# Altium PCB Copy of UAV_MCNV2P1.PcbDoc (part 1 of 2)
Units mil, origin at the board's own origin, x right, y up, seen from the top; angles counter-clockwise.
Board outline 1765.59 x 1577.6 mil, 6 copper layers (Component Side, Inner Layer 1, Power Plane (VCC), Ground Plane (GND), Inner Layer 2, Solder Side), stack 64.373 mil thick; 120 components, 102 nets, 559 pads, 317 vias.
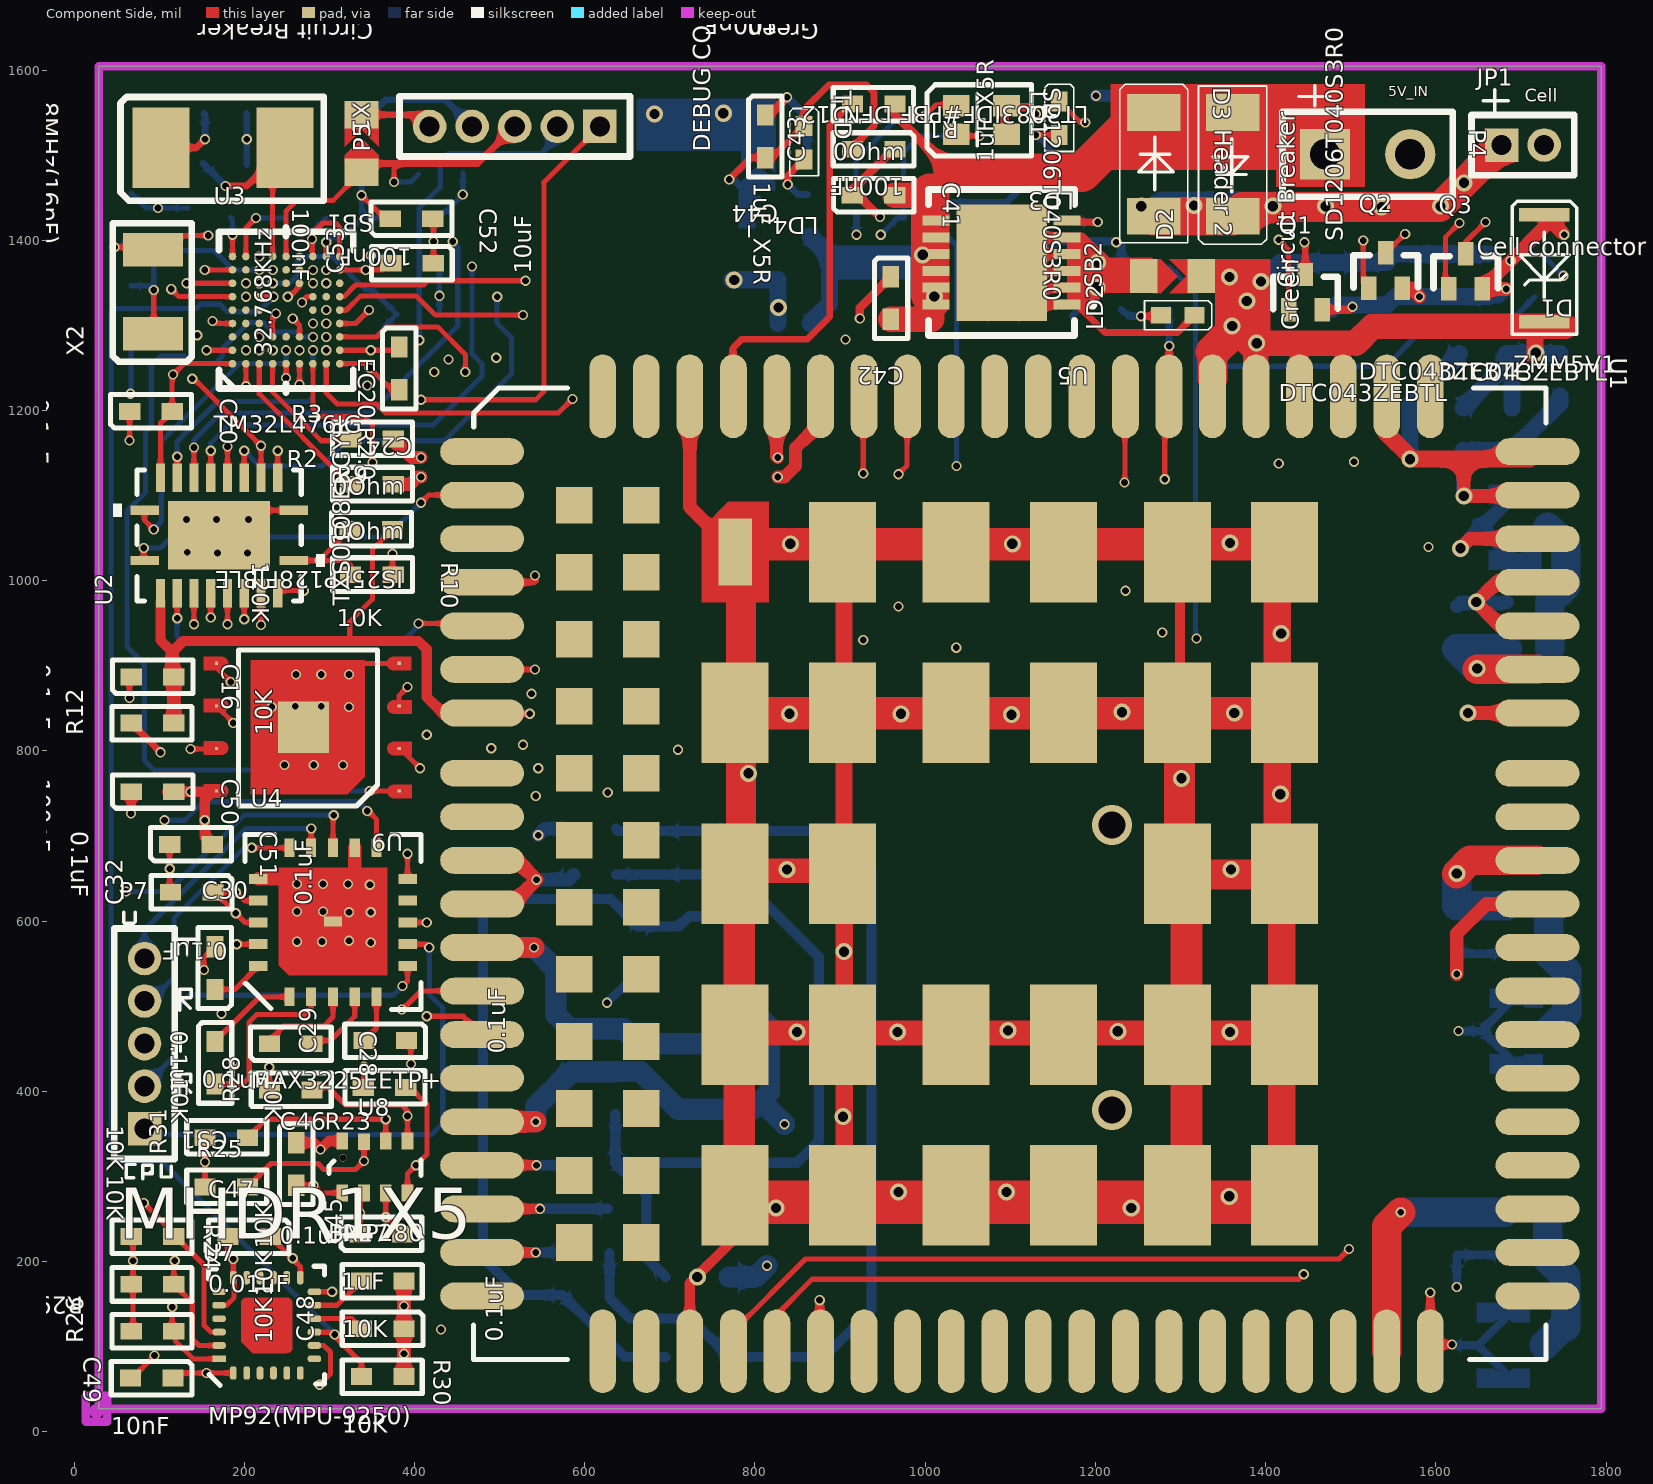
[diagram p0: Component Side view]
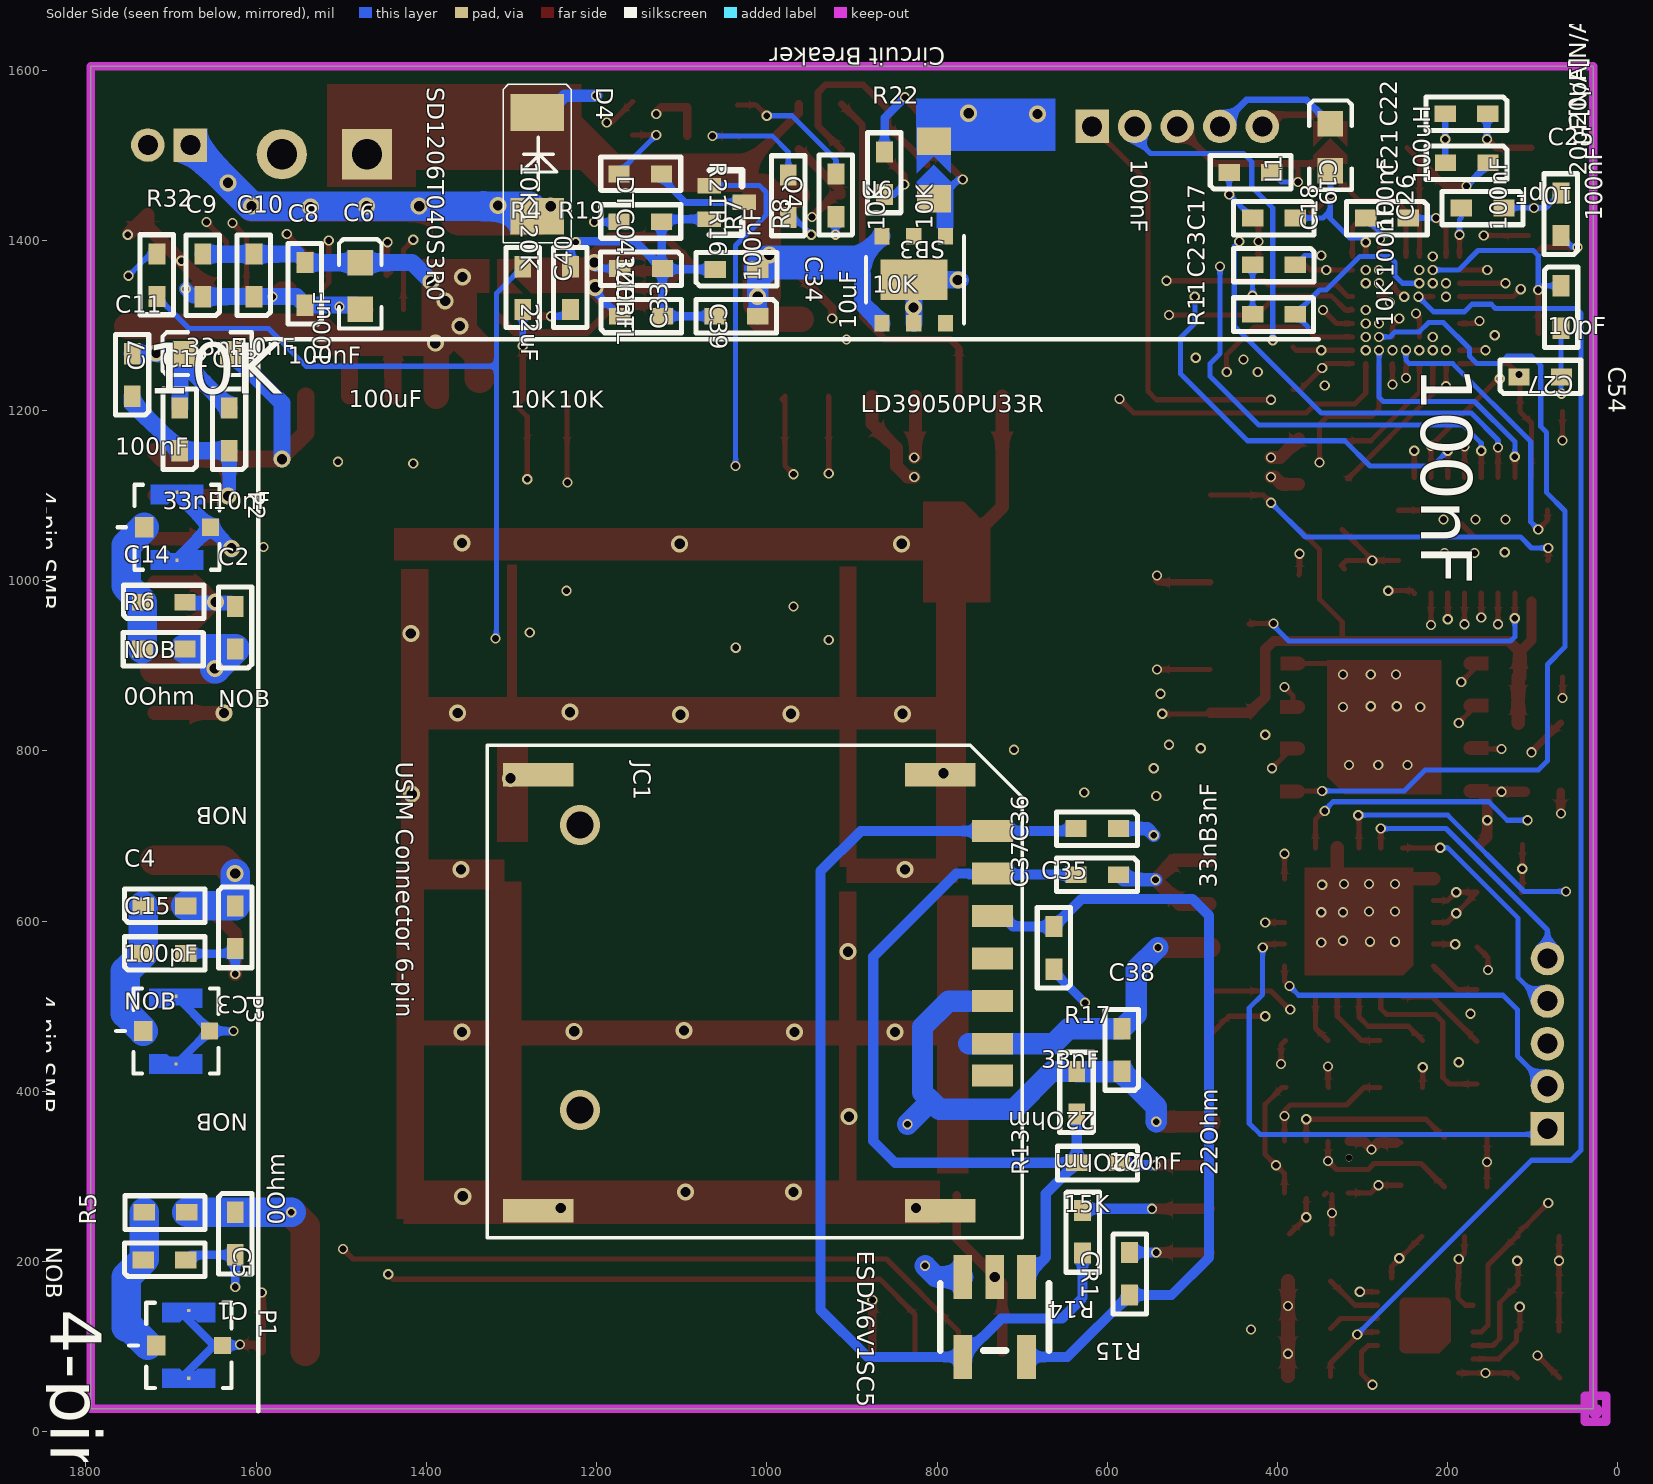
[diagram p1: Solder Side view, seen from below]
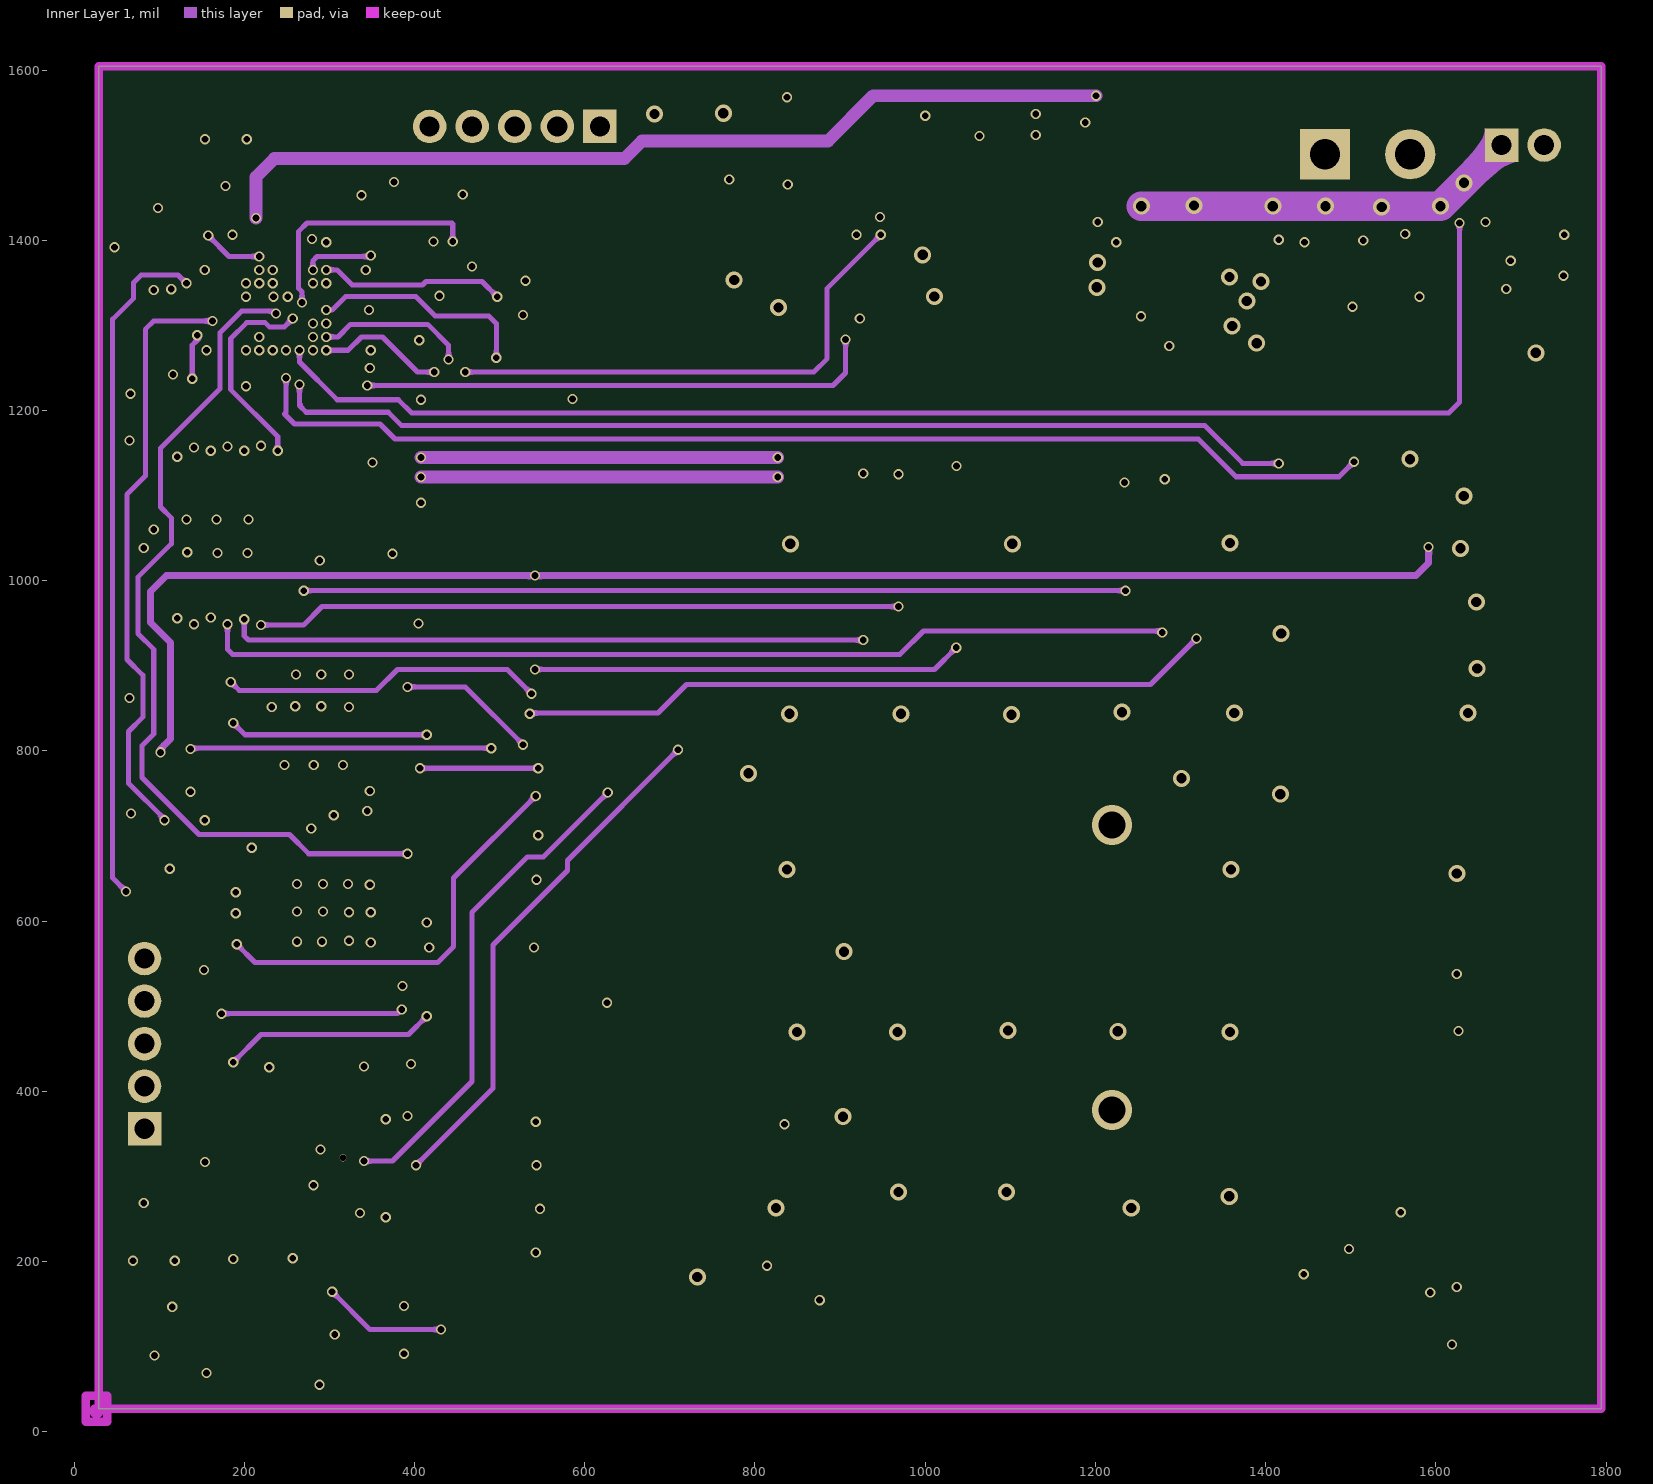
[diagram p2: Inner Layer 1]
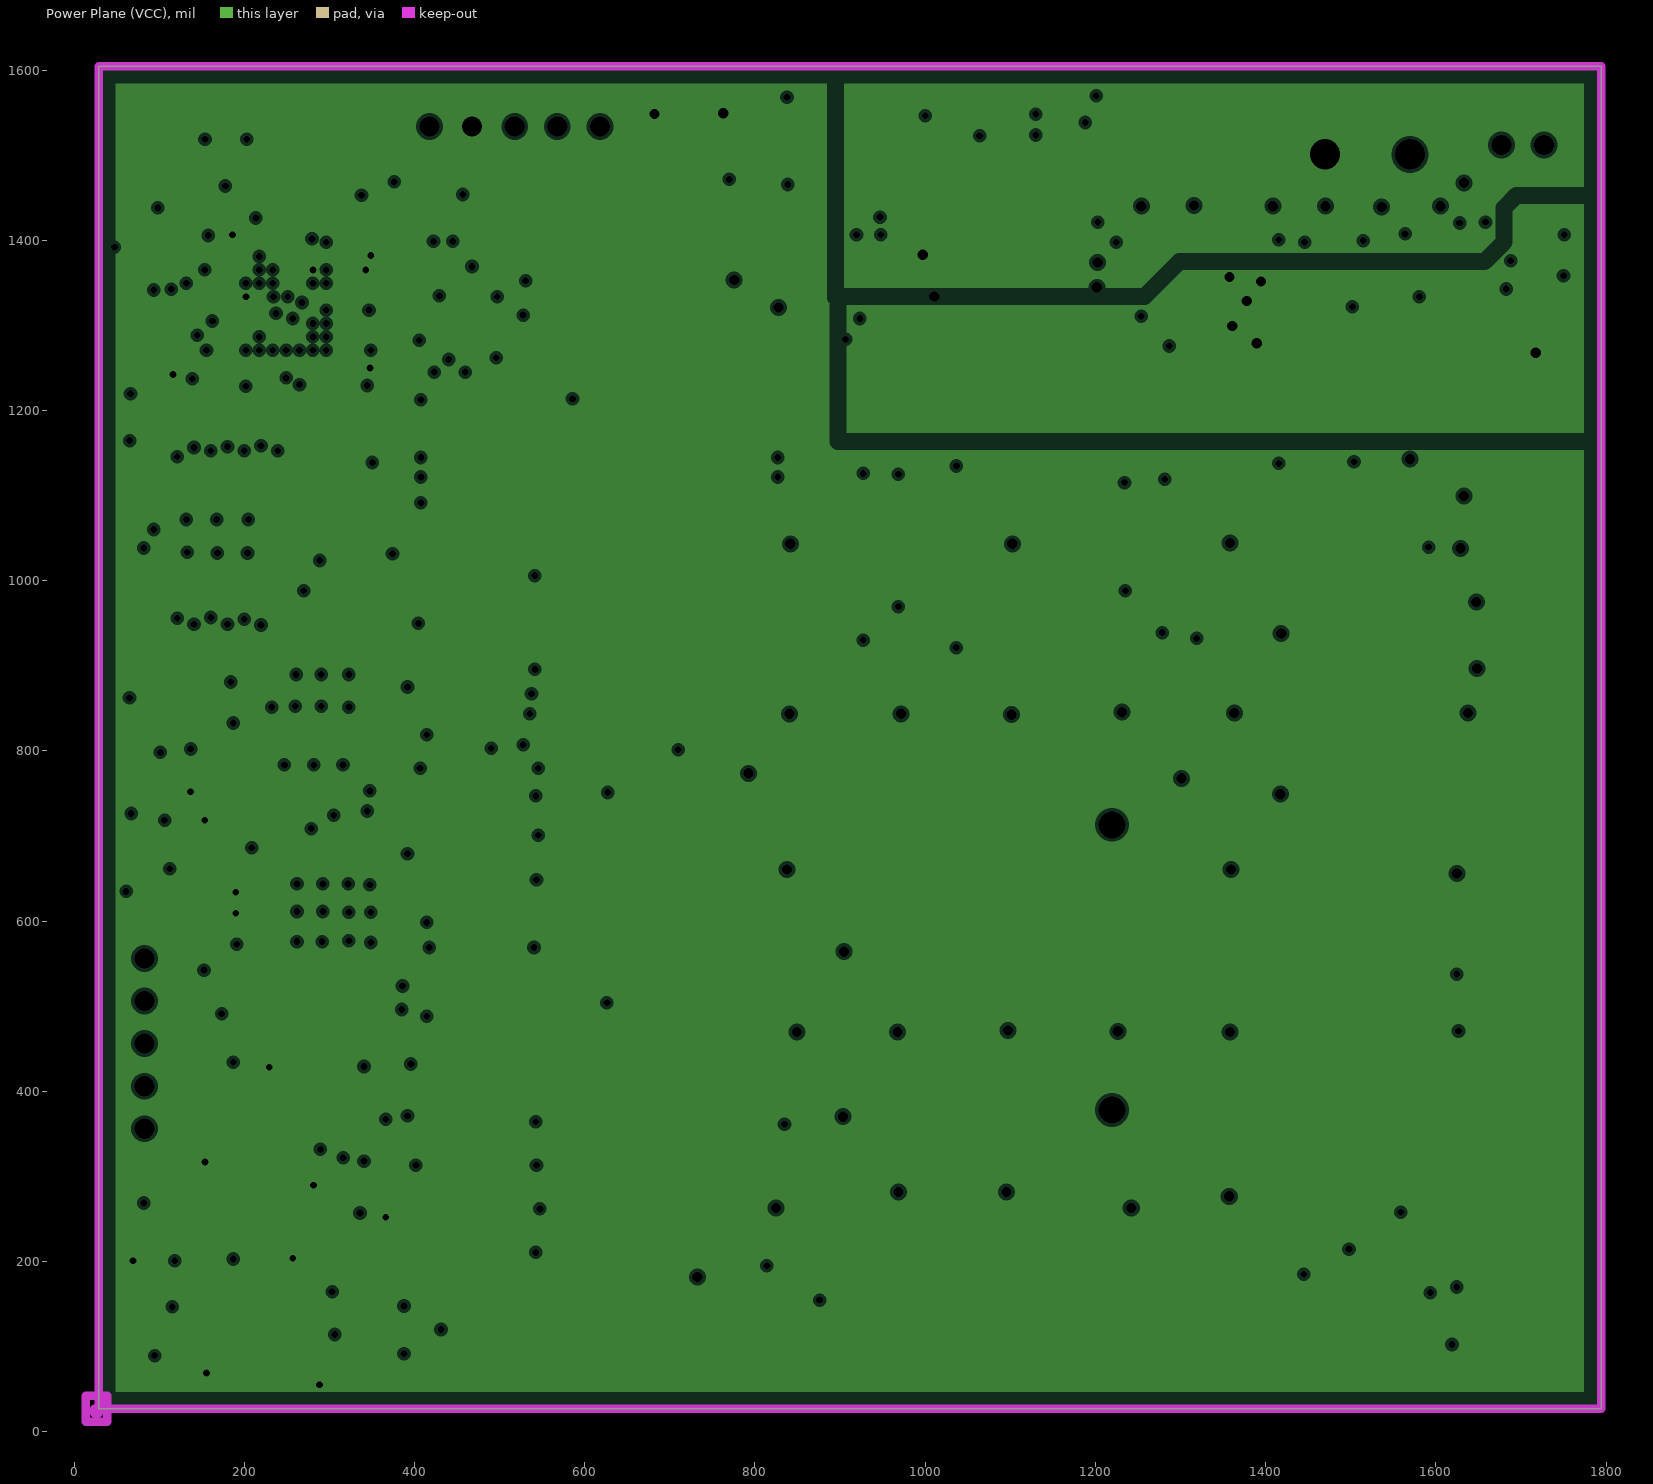
[diagram p3: Power Plane (VCC), clearances drawn from the general rule]
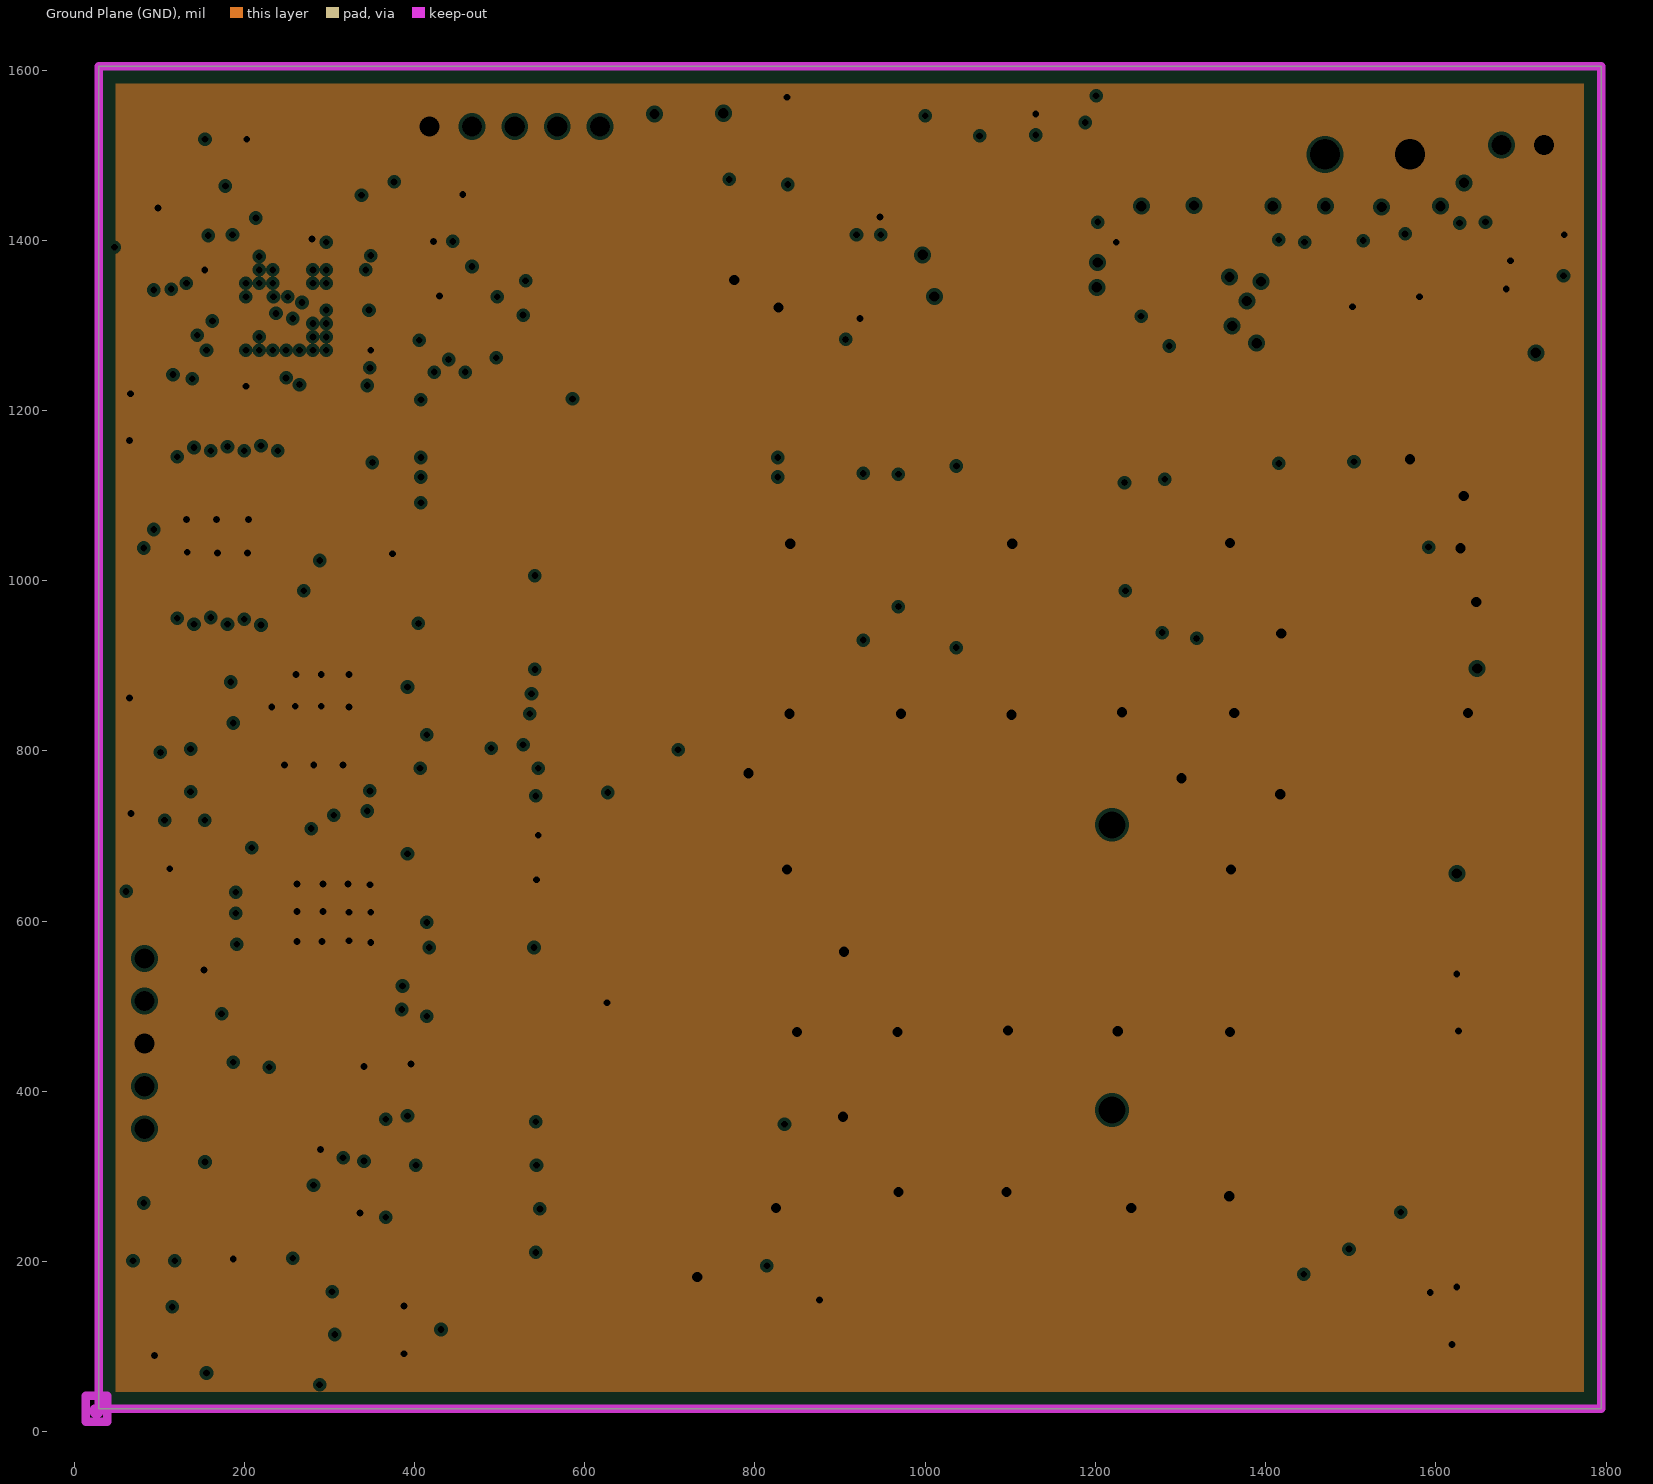
[diagram p4: Ground Plane (GND), clearances drawn from the general rule]
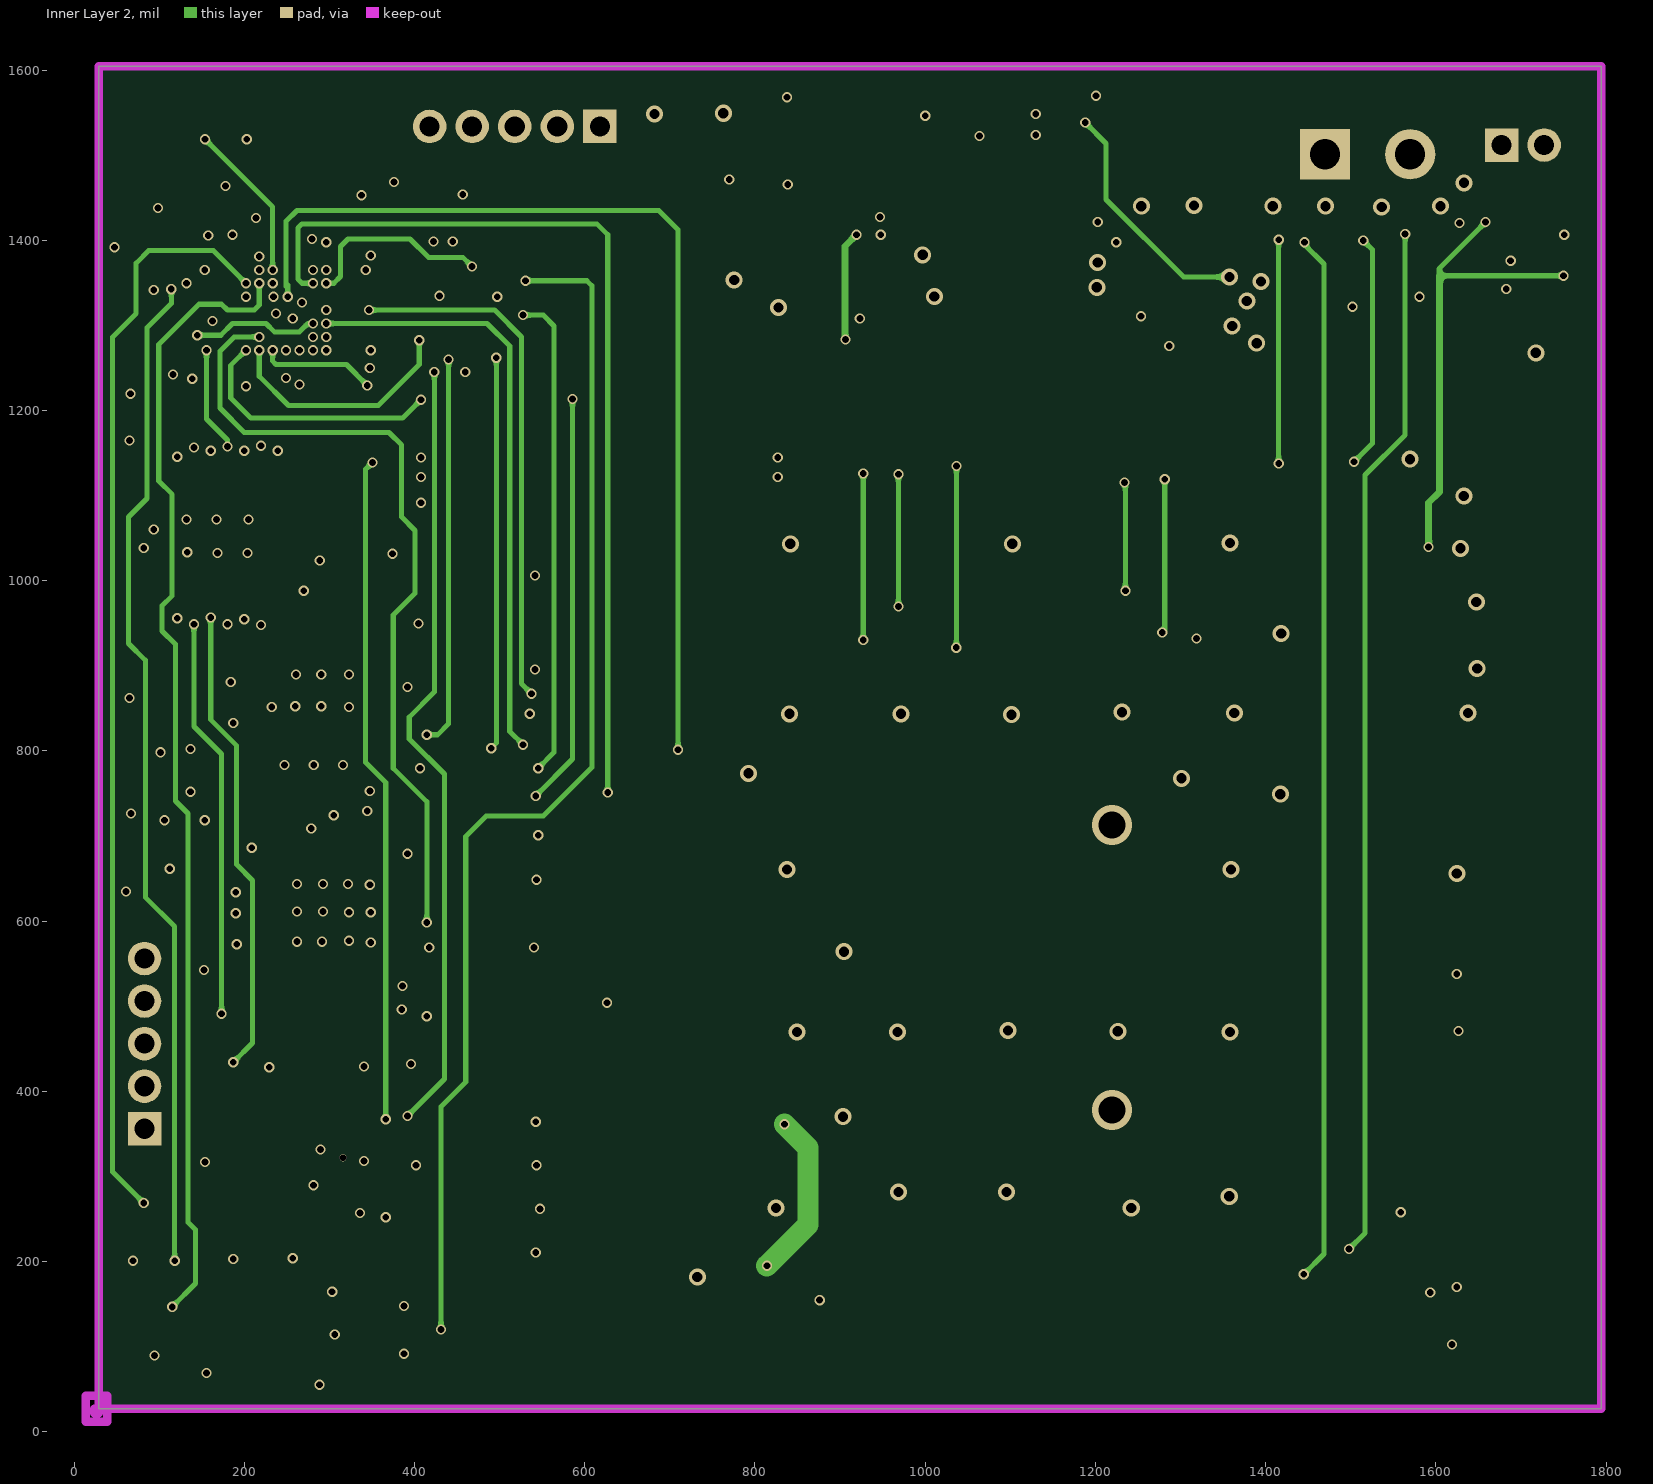
[diagram p5: Inner Layer 2]

## Layer stack, top to bottom
Top Solder: solder mask 0.4, Solder Resist, Dk 3.5
Component Side: signal copper 1.4
Dielectric 1: prepreg 4.724, Dk 4.2
Inner Layer 1: signal copper 1.417
Dielectric 6: core 19.685, FR-4, Dk 4.2
Power Plane (VCC): plane copper 1.417, net (Multiple Nets)
Dielectric 4: prepreg 7.087, Dk 4.2
Ground Plane (GND): plane copper 1.417, net GND
Dielectric 3: core 19.685, Dk 4.2
Inner Layer 2: signal copper 1.417
Dielectric 5: prepreg 4.724, Dk 4.2
Solder Side: signal copper 1.4
Bottom Solder: solder mask 0.4, Solder Resist, Dk 3.5

## Board outline
28.7,26.73 28.7,1604.33 1794.29,1604.33 1794.29,26.73

## Design rules (kind name [scope] priority, off if disabled: settings)
Clearance [All] p1: gap=6 except(3: SMDPad-Via THPad-Via Via-Via)
ComponentClearance [All] p1: gap=7 collisioncheckmode=3 verticalgap=8 showdistances=FALSE
DiffPairsRouting [InDifferentialPairClass('All Differential Pairs')] p1: maxlimit=20 minlimit=8 mostfreqgap=8 toplayer_minwidth=12 toplayer_maxwidth=40 toplayer_prefwidth=15 midlayer1_minwidth=12 midlayer1_maxwidth=40 midlayer1_prefwidth=15 midlayer2_minwidth=12 midlayer2_maxwidth=40 midlayer2_prefwidth=15 bottomlayer_minwidth=12 bottomlayer_maxwidth=40 bottomlayer_prefwidth=15 maxuncoupledlength=100
HoleSize [All] p1: absolutevalues=TRUE maxlimit=100 minlimit=6 maxpercent=80.000 minpercent=20.000
HoleToHoleClearance [All] p1: gap=6 allowstackedmicrovias=TRUE
MinimumSolderMaskSliver [All] p1: minsoldermaskwidth=6
NetAntennae [All] p1: netantennaetolerance=3
PlaneClearance [All] p1: clearance=4
PlaneConnect [All] p1: planeconnectstyle=Direct reliefexpansion=20 reliefentries=4 reliefconductorwidth=10 reliefairgap=10
PolygonConnect [All] p1: connectstyle=Relief reliefconductorwidth=10 reliefentries=4 polygonreliefangle="45 Angle" airgapwidth=10
RoutingCorners [All] p1: cornerstyle=Round minsetback=100 maxsetback=100
RoutingVias [All] p1: holewidth=8 width=12 viastyle="Through Hole" minholewidth=6 minwidth=10 maxholewidth=20 maxwidth=30
SilkToSolderMaskClearance [IsPad] p1: minsilkscreentomaskgap=4 clearancetoexposedcopper=TRUE
SolderMaskExpansion [All] p1: expansion=4
Width Width_GND [InNet('GND')] p1: maxlimit=100 minlimit=6 preferedwidth=16
Width Width_usim [(InNet('USIM_GND') AND InNet('USIM_VDD'))] p2: maxlimit=30 minlimit=20 preferedwidth=25
Width Width_Signle [(InNet('ANT_DIV')OR InNet('ANT_DT') OR InNet('ANT_G')OR InNet('ANT_GT')OR InNet('ANT_M')OR InNet('ANT_MT'))] p3: maxlimit=47.59 minlimit=26 preferedwidth=40.65 toplayer_minwidth=34.69 midlayer1_maxwidth=35.84 midlayer1_prefwidth=30.55 midlayer2_maxwidth=35.84 midlayer2_prefwidth=30.55 bottomlayer_minwidth=34.69 impedancedriven=TRUE minimp=45.000000 maximp=55.000000 favimp=50.000000
Width Width_diff [(InNet('USB_D_N')OR InNet('USB_D_P') OR InNet('USB_N')OR InNet('USB_P'))] p4: maxlimit=40.65 minlimit=30.55 preferedwidth=40.65 toplayer_minwidth=40.65 midlayer1_maxwidth=30.55 midlayer1_prefwidth=30.55 midlayer2_maxwidth=30.55 midlayer2_prefwidth=30.55 bottomlayer_minwidth=40.65 impedancedriven=TRUE minimp=50.000000 maximp=50.000000 favimp=50.000000
Width [All] p5: maxlimit=100 minlimit=6 preferedwidth=6
20 further rules are at their usual default settings.

## Classes and differential pairs
component class EC20: C1 C2 C3 C4 C5 C6 C7 C8 C9 C10 C11 C12 C13 C14 C15 D1 P1 P2 P3 R1 R2 R3 R4 R5 R6 R12 U1
component class MCU: C16 C17 C18 C19 C20 C21 C22 C23 C24 C25 C26 C27 C28 C29 C30 C31 C32 C52 C53 C54 L1 LD1 P4 P5 P7 R7 R8 R9 R10 R11 SB1 U2 U3 U4 X1 X2
component class PWR: C33 C34 C35 C36 C37 C38 C39 C40 C41 C42 C43 C44 CR1 D2 D3 D4 JC1 JP1 LD2 LD3 LD4 Q1 Q2 Q3 Q4 R13 R14 R15 R16 R17 R19 R21 R22 R32 SB2 SB3 U5 U6
component class SENSOR: C45 C46 C47 C48 C49 C50 C51 R23 R24 R25 R26 R27 R28 R29 R30 R31 U7 U8 U9
differential pair USB_D: +USB_D_P -USB_D_N
differential pair USB: +USB_P -USB_N

## Components (designator, comment, footprint, x,y, rotation, side; value= is the part's Value field where it differs from the comment)
C1 "NOB" 0402C 1009.87,-4665 r270 bottom
C2 "NOB" 0402C 2239.54,5842.46 r90 bottom
C3 "NOB" 0402C 1009.87,-4305 r270 bottom
C4 "100pF" 0402C -3190.03,1232.57 r180 bottom
C5 "NOB" 0402C -3190.03,816.57 r180 bottom
C6 "100uF" 0603C 1477.7,1346.23 r90 bottom
C7 "100uF" 0603C 1655.2,1266.73 r0 bottom
C8 "100nF" 0402C 2157.54,6246.46 r90 bottom
C9 "33nF" 0402C 2277.54,6256.46 r90 bottom
C10 "10nF" 0402C 2217.54,6256.46 r90 bottom
C11 "100nF" 0402C 2360.54,6139.46 r90 bottom
C12 "33nF" 0402C 2304.54,6075.46 r90 bottom
C13 "10nF" 0402C 2246.54,6075.46 r90 bottom
C14 "NOB" 0402C -3189.03,1589.57 r180 bottom
C15 "NOB" 0402C -3190.03,1176.57 r180 bottom
C16 "0.1uF" 0402C 4989.86,1501.65 r0 top
C17 "100nF" 0402C 5301.87,811.35 r0 bottom
C18 "100nF" 0402C 5168.99,811.35 r0 bottom
C19 "100nF" 0402C -4466.03,2094.57 r180 bottom
C20 "0.1uF" 0402C 4987.89,1813.65 r0 top
C21 "20pF[N/A]" 0402C 5075.29,876.31 r0 bottom
C22 "20pF[N/A]" 0402C 5075.43,933.9 r0 bottom
C23 "100nF" 0402C 5301.87,756.23 r0 bottom
C24 "100nF" 0402C 996.72,-3648.32 r270 top
C25 "10pF" 0402C 681.76,6328.24 r90 bottom
C26 "100nF" 0402C 5056.59,823.16 r0 bottom
C27 "10pF" 0402C -547.91,-3576.28 r270 bottom
C28 "0.1uF" 0402C 5152.26,1070.54 r0 top
C29 "0.1uF" 0402C -4532.18,-155.19 r180 top
C30 "0.1uF" 0402C -449.48,5442.42 r90 top
C31 "0.1uF" 0402C 780.19,-4464.27 r270 top
C32 "0.1uF" 0402C -4759.54,19.02 r180 top
C33 "10uF" 0402C 5933.43,695.9 r0 bottom
C34 "100nF" 0402C -3862.03,1980.57 r180 bottom
C35 "33nF" 0402C 1277.24,5466.24 r90 bottom
C36 "33nF" 0402C 5509.54,93.83 r0 bottom
C37 "33nF" 0402C 5509.54,39.69 r0 bottom
C38 "100nF" 0402C 1197.51,5346.16 r90 bottom
C39 "22uF" 0402C -3750.03,1925.57 r180 bottom
C40 "100nF" 0402C 6045.43,751.9 r0 bottom
C41 "1uF_X5R" 0402C 5837.1,2067.59 r0 top
C42 "100nF" 0402C 1574.48,-3565.65 r270 top
C43 "1uF_X5R" 0402C -3958.17,892.06 r180 top
C44 "100nF" 0402C 1426.84,-3375.69 r270 top
C45 "1uF" 0402C 5258.56,847.12 r0 top
C46 "0.1uF" 0402C 875.66,-4583.17 r270 top
C47 "0.01uF" 0402C -4692.42,-385.5 r180 top
C48 "0.1uF" 0402C -4535.13,-493.77 r180 top
C49 "10nF" 0402C -4806.59,-551.84 r180 top
C50 "100nF" 0402C 4989.86,1366.8 r0 top
C51 "0.1uF" 0402C 5034.94,1304.8 r0 top
C52 "100nF" 0402C 5293.99,2040.03 r0 top
C53 "10uF" 0402C -4500.68,758.2 r180 top
C54 "100nF" 0402C -4806.59,1854.01 r180 bottom
CR1 "ESDA6V1SC5" SOT23-5L 732.28,134.84 r270 bottom
D1 "ZMM5V1" LL-34 1727.36,1430.12 r270 top
D2 "SD1206T040S3R0" 1206 1361.22,1428.15 r90 top
D3 "SD1206T040S3R0" 1206 1268.7,1550.2 r270 top
D4 "SD1206T040S3R0" 1206 1269.69,1550.2 r270 bottom
JC1 "USIM Connector 6-pin" "NANO SIM socket" 1268.7,771.65 r270 bottom
JP1 "Cell connector" MHDR1X2 1677.36,1511.81 r0 top
L1 "100uH" 0603L 337.7,1509.23 r90 bottom
LD1 "TCD" 0603DD 1036.42,1558.07 r0 top
LD2 "Green" 0402 1296.7,1311.73 r180 top
LD3 "Green" 0402 1157.48,1543.31 r270 top
LD4 "Green" 0402 857.7,1514.73 r270 top
P1 "4-pin SMB" "I-PEX 4" 1679.13,101.38 r270 bottom
P2 "4-pin SMB" "I-PEX 4" 1693.07,1062.73 r270 bottom
P3 "4-pin SMB" "I-PEX 4" 1694.31,470.73 r270 bottom
P4 "Header 2" HDR1X2 1469.88,1500.98 r0 top
P5 "DEBUG CONNECTOR" MHDR1X5 617.7,1533.73 r180 top
P7 "MHDR1X5" MHDR1X5 82.68,355.91 r90 top
Q1 "DTC043ZEBTL" SOT-416FL 1446.7,1338.08 r0 top
Q2 "DTC043ZEBTL" SOT-416FL 1541.01,1363.42 r0 top
Q3 "DTC043ZEBTL" SOT-416FL 1635.01,1362.42 r0 top
Q4 "DTC043ZEBTL" SOT-416FL 1048.02,1444.42 r270 bottom
R1 "0Ohm" 0402R 964.57,1560.04 r180 top
R2 "0Ohm" 0402R 325,1113.19 r0 top
R3 "0Ohm" 0402R 325,1166.34 r0 top
R4 "10K" 0402R 1286.7,1318.73 r90 bottom
R5 "0Ohm" 0402R 1681.7,257.73 r0 bottom
R6 "0Ohm" 0402R 1683.7,919.73 r0 bottom
R7 "10K" 0402R 974.7,1426.73 r90 bottom
R8 "10K" 0402R 918.7,1427.73 r90 bottom
R9 "10K" 0402R 324.02,1060.04 r0 top
R10 "120K" 0402R 324.8,1006.89 r0 top
R11 "10K" 0402R 379.13,1312.99 r0 bottom
R12 "10K" 0402R 117.13,832.68 r180 top
R13 "22Ohm" 0402R 585.83,315.94 r0 bottom
R14 "22Ohm" 0402R 628.94,259.84 r270 bottom
R15 "22Ohm" 0402R 573.82,210.63 r270 bottom
R16 "120K" 0402R 1173.7,1421.73 r180 bottom
R17 "15K" 0402R 635.83,373.23 r90 bottom
R19 "10K" 0402R 1230.7,1318.73 r90 bottom
R21 "10K" 0402R 1173.7,1477.73 r180 bottom
R22 "10K" 0402R 861.7,1453.73 r90 bottom
R23 "10K" 0402R 339.57,404.53 r0 top
R24 "10K" 0402R 117.13,229.33 r180 top
R25 "10K" 0402R 153.74,287.4 r0 top
R26 "10K" 0402R 117.13,118.11 r180 top
R27 "10K" 0402R 387.6,177.17 r180 top
R28 "10K" 0402R 229.53,401.58 r0 top
R29 "10K" 0402R 117.13,173.23 r180 top
R30 "10K" 0402R 387.6,64.96 r180 top
R31 "10K" 0402R 153.74,345.47 r0 top
R32 "10K" 0402R 1716.54,1333.86 r90 bottom
SB1 "Circuit Breaker" JP2_SMD 337.7,1513.73 r270 top
SB2 "Circuit Breaker" JP2_SMD 1290.7,1357.73 r180 top
SB3 "Circuit Breaker" JP2_SMD 803.7,1482.48 r270 bottom
U1 "EC20 R2.0" EC20_R2.0 1099.41,655.51 r0 top
U2 "TXS0108ERGYR" PVQFN-N20 170.28,1053.15 r90 top
U3 "TM32L476JG" WLCSP72 249.02,1317.91 r90 top
U4 "MAX3225EETP+" TQFN 304.13,598.43 r0 top
U5 "LT3083IDF#PBF DFN_12" DFN-12_DF 1089.7,1373.73 r180 top
U6 "LD39050PU33R" DFN6(3X3) 827.3,1353.55 r180 bottom
U7 "MP92(MPU-9250)" "QFN 3*3" 226.38,125 r90 top
U8 "BMP280" LGA-BMP 353.35,311.02 r90 top
U9 "IS25LP128FJBLE" WSON-ISSI 377.95,827.76 r180 top
X1 "8MHz(16pF)" 5032 102.03,1508.73 r0 top
X2 "32.768KHz" 3215 92.69,1290.31 r90 top

## Footprints (in the part's own frame and the unit in brackets; to place one, negate y for a bottom-side part, rotate by r counter-clockwise, add the part's x,y. Pads: shape width x height; smd on the part's side, far side on the other; paste and mask are expansions set on the pad)
0402 [mm] "Chip Capacitor, Body 1.0x0.5mm, IPC High Density"
  rect 0.6x0.5 smd: 1(-0.5,0) 2(0.5,0)
  silkscreen extent -1.02,-0.43 0.99,0.43, body extent -0.55,-0.3 0.55,0.3, height 1.3
0402C [mm] "0402 for capacitor"
  rect 0.635x0.5 smd: 1(-125.037,-15.617) 2(-123.767,-15.617)
  silkscreen extent -125.6,-16.11 -123.19,-15.11
0402R [mm] "0402 for resistor"
  rect 0.635x0.5 smd: 1(0,0) 2(1.27,0)
  silkscreen extent -0.55,-0.49 1.84,0.51
0603C [mil]
  rect 30x30 smd: 1(27.5,0) 2(-27.5,0)
  silkscreen extent -50,-25 55,25
0603DD [mm] "twise colour diode"
  rect 0.8x0.65 smd: 1(0,0) 2(1.5,-0.85) 2(1.5,0) 3(0,-0.85)
  silkscreen extent -0.87,-1.5 2.25,0.63
0603L [mil]
  rect 30x30 smd: 1(27.5,0) 2(-27.5,0)
  silkscreen extent -50,-25 55,25
1206 [mm] "4*1.6mm"
  rect 1.1x1.6 smd: 1(0,0) 2(3.1,0)
  silkscreen extent -0.84,-1.02 3.89,1.02, body extent 0.03,-0.89 3.12,0.83, height 1.3
3215 [mm] "FC-135/FC-135R"
  rect 1x1.8 smd: 1(0,0) 2(2.5,0)
  silkscreen extent -0.84,-1.16 3.29,1.2
5032 [mm] "5.0*3.2*1.2mm"
  rect 1.7x2.4 smd: 1(0,0) 2(3.7,0)
  silkscreen extent -1.21,-1.58 4.86,1.51
DFN6(3X3) [mm]
  rect 0.45x0.5 smd: 1(-0.95,-1.3) 2(0,-1.3) 3(0.95,-1.3) 4(0.95,1.3) 5(0,1.3) 6(-0.95,1.3)
  rect 2x1.2 smd: 7(0,0)
  silkscreen extent -1.42,-1.3 1.5,1.3
DFN-12_DF [mm]
  rect 0.805x0.3 smd paste+0 mask+0: 1(-1.952,1.25) 2(-1.952,0.75) 3(-1.952,0.25) 4(-1.952,-0.25) 5(-1.952,-0.75) 6(-1.952,-1.25) 7(1.952,-1.25) 8(1.952,-0.75) 9(1.952,-0.25) 10(1.952,0.25) 11(1.952,0.75) 12(1.952,1.25)
  rect 2.7x3.48 smd paste-1.727 mask+0: 13(0,0)
  silkscreen extent -2.78,-2.18 2.18,2.18, body extent 0,0 0.25,0.25, height 0.25
EC20_R2.0 [mm]
  oval 2.5x0.8 smd: 1(-15.75,12.6) 2(-15.75,11.3) 3(-15.75,10) 4(-15.75,8.7) 5(-15.75,7.4) 6(-15.75,6.1) 7(-15.75,4.8) 8(-15.75,0.4) 9(-15.75,-0.9) 10(-15.75,-2.2) 11(-15.75,-3.5) 12(-15.75,-4.8) 13(-15.75,-6.1) 14(-15.75,-7.4) 15(-15.75,-8.7) 16(-15.75,-10) 17(-15.75,-11.3) 18(-15.75,-12.6) 37(15.75,-12.6) 38(15.75,-11.3) 39(15.75,-10) 40(15.75,-8.7) 41(15.75,-7.4) 42(15.75,-6.1) 43(15.75,-4.8) 44(15.75,-3.5) 45(15.75,-2.2) 46(15.75,-0.9) 47(15.75,0.4) 48(15.75,4.8) 49(15.75,6.1) 50(15.75,7.4) 51(15.75,8.7) 52(15.75,10) 53(15.75,11.3) 54(15.75,12.6) 141(-15.75,3) 142(-15.75,1.7) 143(15.75,1.7) 144(15.75,3)
  oval 0.8x2.5 smd: 19(-9.55,-14.25) 20(-8.25,-14.25) 21(-6.95,-14.25) 22(-5.65,-14.25) 23(-4.35,-14.25) 24(-3.05,-14.25) 25(-1.75,-14.25) 26(-0.45,-14.25) 27(0.85,-14.25) 28(2.15,-14.25) 29(3.45,-14.25) 30(4.75,-14.25) 31(6.05,-14.25) 32(7.35,-14.25) 33(8.65,-14.25) 34(9.95,-14.25) 35(11.25,-14.25) 36(12.55,-14.25) 55(12.55,14.25) 56(11.25,14.25) 57(9.95,14.25) 58(8.65,14.25) 59(7.35,14.25) 60(6.05,14.25) 61(4.75,14.25) 62(3.45,14.25) 63(2.15,14.25) 64(0.85,14.25) 65(-0.45,14.25) 66(-1.75,14.25) 67(-3.05,14.25) 68(-4.35,14.25) 69(-5.65,14.25) 70(-6.95,14.25) 71(-8.25,14.25) 72(-9.55,14.25) 113(-10.85,14.25) 114(-12.15,14.25) 115(-10.85,-14.25) 116(-12.15,-14.25)
  rect 2x3 smd: 85(8.2,9.6) 86(8.2,4.8) 87(8.2,0) 88(8.2,-4.8) 89(8.2,-9.6) 90(5,9.6) 91(5,4.8) 92(5,0) 93(5,-4.8) 94(5,-9.6) 95(1.6,9.6) 96(1.6,4.8) 97(1.6,-4.8) 98(1.6,-9.6) 99(-1.6,9.6) 100(-1.6,4.8) 101(-1.6,-4.8) 102(-1.6,-9.6) 103(-5,9.6) 104(-5,4.8) 105(-5,0) 106(-5,-4.8) 107(-5,-9.6) 109(-8.2,4.8) 110(-8.2,0) 111(-8.2,-4.8) 112(-8.2,-9.6)
  rect 1x2 smd: 108(-8.2,9.6)
  rect 1.1x1.1 smd: 117(-11,11) 118(-11,9) 119(-11,7) 120(-11,5) 121(-11,3) 122(-11,1) 123(-11,-1) 124(-11,-3) 125(-11,-5) 126(-11,-7) 127(-11,-9) 128(-11,-11) 129(-13,11) 130(-13,9) 131(-13,7) 132(-13,5) 133(-13,3) 134(-13,1) 135(-13,-1) 136(-13,-3) 137(-13,-5) 138(-13,-7) 139(-13,-9) 140(-13,-11)
  Component Side pour cut-out: 3.5,2.8 -3.5,2.8 -3.5,-2.8 3.5,-2.8 3.5,2.8
  Component Side region: -9.2,10.3 -8.4,11.1 -7.2,11.1 -7.2,8.1 -9.2,8.1 -9.2,10.3
  silkscreen extent -16,-14.5 16,14.5
HDR1X2 [mm] "Connector; Header; 2 Position"
  rect 1.5x1.5 hole 0.9: 1(0,0)
  round 1.5 hole 0.9: 2(2.54,0)
  silkscreen extent -1.27,-1.27 3.81,1.27
"I-PEX 4" [mm] "I-PEX 4 genarator 2*2*0.6mm"
  rect 0.6x0.55 smd: 1(0,-0.975)
  rect 0.1x0.1 smd: 2(0.985,0) 4(-1.041,0)
  rect 0.508x0.508 smd: 3(0,1)
  Component Side region: -1.27,-0.79 -1.27,0.79 -0.69,0.79 -0.69,0.27 -0.77,0.19 -0.77,-0.19 -0.69,-0.27 -0.69,-0.79
  Component Side region: 1.27,0.79 1.27,-0.79 0.69,-0.79 0.69,-0.27 0.77,-0.19 0.77,0.19 0.69,0.27 0.69,0.79
  silkscreen extent -1.27,-1.78 1.27,1.27
JP2_SMD [mil]
  rect 32x40 smd: 1(33.75,0) 2(-33.75,0)
  Component Side region: -26.25,0 -16.25,0 3.75,-20 -26.25,-20
  Component Side region: -26.25,0 -16.25,0 3.75,20 -26.25,20
  Component Side region: 23.75,20 13.75,20 -6.25,0 13.75,-20 23.75,-20
LGA-BMP [mm] "LGA 2.0*2.5*0.95mm"
  rect 0.5x0.35 smd: 1(0.775,0.975) 2(0.755,0.325) 3(0.775,-0.325) 4(0.775,-0.975) 5(-0.775,-0.975) 6(-0.775,-0.325) 7(-0.775,0.325) 8(-0.775,0.975)
  silkscreen extent -0.25,-1.38 0.2,1.37
LL-34 [mm] "ZMM5V1 Diode 3.5*1.5mm"
  rect 0.4x1.5 smd: 1(0,0) 2(3.2,0)
  silkscreen extent -0.4,-0.95 3.57,0.97
MHDR1X2 [mm] "Connector; Header; 2 Position"
  rect 1x1 hole 0.6: 1(0,0)
  round 1 hole 0.6: 2(1.27,0)
  silkscreen extent -0.9,-0.9 2.17,0.9
MHDR1X5 [mm] "Connector; Header; 5 Position"
  rect 1x1 hole 0.6: 1(0,0)
  round 1 hole 0.6: 2(1.27,0) 3(2.54,0) 4(3.81,0) 5(5.08,0)
  silkscreen extent -0.9,-0.9 5.98,0.9
"NANO SIM socket" [mm] "NANO SIM socket 9.56*12.5mm"
  rect 0.7x2.1 smd: 0(0,0) 0(0,12) 0(13,0) 0(13,12)
  rect 0.65x1.23 smd: 1(6.75,13.565) 2(4.21,13.565) 3(1.67,13.565) 5(8.02,13.565) 6(5.48,13.565) 7(2.94,13.565) CD(8.97,13.565)
  silkscreen extent -0.89,-1.52 13.82,14.45
PVQFN-N20 [mm] "RGY20 4.65*3.65*1"
  rect 0.28x0.85 smd paste-0.412 mask+0: 1(-0.75,2.225) 10(-0.75,-2.225) 11(0.75,-2.225) 20(0.75,2.225)
  rect 0.85x0.28 smd paste-0.412 mask+0: 2(-1.725,1.75) 3(-1.725,1.25) 4(-1.725,0.75) 5(-1.725,0.25) 6(-1.725,-0.25) 7(-1.725,-0.75) 8(-1.725,-1.25) 9(-1.725,-1.75) 12(1.725,-1.75) 13(1.725,-1.25) 14(1.725,-0.75) 15(1.725,-0.25) 16(1.725,0.25) 17(1.725,0.75) 18(1.725,1.25) 19(1.725,1.75)
  rect 2.05x3.05 smd paste-1.512 mask-1.511: 21(0,0)
  silkscreen extent -1.95,-3.16 1.95,3.16, body extent 0,0 0.25,0.25, height 0.25
"QFN 3*3" [mm] "24-pin QFN 3.0*3.0*1mm"
  rrect80% 0.4x0.2 smd mask+0.05: 1(-1.425,1.002) 2(-1.425,0.602) 3(-1.425,0.202) 4(-1.424,-0.198) 5(-1.424,-0.598) 6(-1.424,-0.998) 13(1.42,-0.998) 14(1.42,-0.598) 15(1.42,-0.198) 16(1.42,0.202) 17(1.42,0.602) 18(1.42,1.002)
  rrect80% 0.2x0.4 smd mask+0.05: 7(-1.002,-1.42) 8(-0.602,-1.42) 9(-0.202,-1.42) 10(0.198,-1.42) 11(0.598,-1.42) 12(0.998,-1.42) 19(0.998,1.424) 20(0.598,1.424) 21(0.198,1.424) 22(-0.202,1.424) 23(-0.602,1.424)
  rrect0% 0.2x0.4 smd mask+0.05: 24(-1.002,1.424)
  Component Side region: -0.677,-0.76 -0.735,-0.748 -0.783,-0.716 -0.816,-0.667 -0.827,-0.61 -0.827,-0.61 -0.827,0.425 -0.488,0.764 0.67,0.764 0.728,0.753 0.776,0.72 0.809,0.672 0.82,0.614 0.82,0.614 0.823,0.612 0.823,-0.607 0.811,-0.665 0.779,-0.714 0.73,-0.746 0.673,-0.757 0.673,-0.757 0.67,-0.76
  silkscreen extent -1.79,-1.73 1.76,1.74
SOT23-5L [mil]
  rect 52x22 smd paste+0 mask+0: 1(-47,37.4) 2(-47,0) 3(-47,-37.4) 4(47,-37.4) 5(47,37.4)
  silkscreen extent -40,-64 40,64, body extent 0,0 10,10, height 10
SOT-416FL [mm]
  rect 0.46x0.7 smd: 1(-0.5,-0.5) 2(0.5,-0.5) 3(0,0.55)
  silkscreen extent -0.96,-0.48 0.96,0.48
TQFN [mm] "Thin QFN , 5*5*0.75mm"
  rect 0.3x0.55 smd: 1(-1.3,-2.225) 2(-0.65,-2.225) 3(0,-2.225) 4(0.65,-2.225) 5(1.3,-2.225) 11(1.3,2.225) 12(0.65,2.225) 13(0,2.225) 14(-0.65,2.225) 15(-1.3,2.225)
  rect 0.55x0.3 smd: 6(2.225,-1.3) 7(2.225,-0.65) 8(2.225,0) 9(2.225,0.65) 10(2.225,1.3) 16(-2.225,1.3) 17(-2.225,0.65) 18(-2.225,0) 19(-2.225,-0.65) 20(-2.225,-1.3) 21(0,0.025)
  Component Side region: 1.625,-1.575 -1.325,-1.575 -1.625,-1.275 -1.625,-1.275 -1.625,1.625 1.625,1.625
  silkscreen extent -2.63,-2.6 2.63,2.63
WLCSP72 [mil]
  round 9 smd paste+0.5 mask+1: A1(-62.99,62.99) A2(-47.24,62.99) A3(-31.5,62.99) A4(-15.75,62.99) A5(0,62.99) A6(15.75,62.99) A7(31.5,62.99) A8(47.24,62.99) A9(62.99,62.99) B1(-62.99,47.24) B2(-47.24,47.24) B3(-31.5,47.24) B4(-15.75,47.24) B5(0,47.24) B6(15.75,47.24) B7(31.5,47.24) B8(47.24,47.24) B9(62.99,47.24) C1(-62.99,31.5) C2(-47.24,31.5) C3(-31.5,31.5) C4(-15.75,31.5) C5(0,31.5) C6(15.75,31.5) C7(31.5,31.5) C8(47.24,31.5) C9(62.99,31.5) D1(-62.99,15.75) D2(-47.24,15.75) D3(-31.5,15.75) D7(31.5,15.75) D8(47.24,15.75) D9(62.99,15.75) E1(-62.99,0) E2(-47.24,0) E3(-31.5,0) E7(31.5,0) E8(47.24,0) E9(62.99,0) F1(-62.99,-15.75) F2(-47.24,-15.75) F3(-31.5,-15.75) F7(31.5,-15.75) F8(47.24,-15.75) F9(62.99,-15.75) G1(-62.99,-31.5) G2(-47.24,-31.5) G3(-31.5,-31.5) G4(-15.75,-31.5) G5(0,-31.5) G6(15.75,-31.5) G7(31.5,-31.5) G8(47.24,-31.5) G9(62.99,-31.5) H1(-62.99,-47.24) H2(-47.24,-47.24) H3(-31.5,-47.24) H4(-15.75,-47.24) H5(0,-47.24) H6(15.75,-47.24) H7(31.5,-47.24) H8(47.24,-47.24) H9(62.99,-47.24) J1(-62.99,-62.99) J2(-47.24,-62.99) J3(-31.5,-62.99) J4(-15.75,-62.99) J5(0,-62.99) J6(15.75,-62.99) J7(31.5,-62.99) J8(47.24,-62.99) J9(62.99,-62.99)
  silkscreen extent -97,-79 97,79, body extent 0,0 10,10, height 10
WSON-ISSI [mm] "WSON IS25LP128JKLE 6*5*0.8mm"
  rect 0.1x0.1 smd: 1(-0.1,1.905) 2(-0.1,0.635) 3(-0.1,-0.635) 4(-0.1,-1.905) 5(5.35,-1.905) 6(5.35,-0.635) 7(5.35,0.635) 8(5.35,1.905)
  rect 1.524x1.524 smd: 9(2.75,0)
  Component Side region: 5.725,-2.1 5.198,-2.1 5.198,-2.1 5.158,-2.1 5.085,-2.07 5.028,-2.013 4.998,-1.94 4.998,-1.86 5.028,-1.787 5.085,-1.73 5.158,-1.7 5.198,-1.7 5.198,-1.7 5.198,-1.7 5.725,-1.7
  Component Side region: 5.725,1.7 5.198,1.7 5.198,1.7 5.158,1.7 5.085,1.73 5.028,1.787 4.998,1.86 4.998,1.94 5.028,2.013 5.085,2.07 5.158,2.1 5.198,2.1 5.198,2.1 5.198,2.1 5.725,2.1
  Component Side region: 5.725,0.425 5.198,0.425 5.198,0.425 5.158,0.425 5.085,0.455 5.028,0.512 4.998,0.585 4.998,0.665 5.028,0.738 5.085,0.795 5.158,0.825 5.198,0.825 5.198,0.825 5.198,0.825 5.725,0.825
  Component Side region: 5.725,-0.85 5.198,-0.85 5.198,-0.85 5.158,-0.85 5.085,-0.82 5.028,-0.763 4.998,-0.69 4.998,-0.61 5.028,-0.537 5.085,-0.48 5.158,-0.45 5.198,-0.45 5.198,-0.45 5.198,-0.45 5.725,-0.45
  Component Side region: -0.468,-0.809 0.059,-0.809 0.059,-0.809 0.098,-0.809 0.172,-0.778 0.228,-0.722 0.259,-0.648 0.259,-0.569 0.228,-0.495 0.172,-0.439 0.098,-0.409 0.059,-0.409 0.059,-0.409 0.059,-0.409 -0.468,-0.409
  Component Side region: -0.472,0.438 0.055,0.438 0.055,0.438 0.095,0.438 0.169,0.469 0.225,0.525 0.255,0.599 0.255,0.678 0.225,0.752 0.169,0.808 0.095,0.838 0.055,0.838 0.055,0.838 0.055,0.838 -0.472,0.838
  Component Side region: -0.468,1.716 0.059,1.716 0.059,1.716 0.098,1.716 0.172,1.747 0.228,1.803 0.259,1.877 0.259,1.956 0.228,2.03 0.172,2.086 0.098,2.116 0.059,2.116 0.059,2.116 0.059,2.116 -0.468,2.116
  Component Side region: 0.925,-2 0.925,1.475 1.45,2 4.325,2 4.325,-2
  Component Side region: -0.462,-2.098 0.065,-2.098 0.065,-2.098 0.105,-2.098 0.179,-2.068 0.235,-2.012 0.265,-1.938 0.265,-1.859 0.235,-1.785 0.179,-1.729 0.105,-1.698 0.065,-1.698 0.065,-1.698 0.065,-1.698 -0.462,-1.698
  silkscreen extent 0.55,-2.3 4.7,2.35

## Part data
C1 C2 C3 C4 C5 C8 C9 C10 C11 C12 C13 C14 C15 C16 C20 C23 C24 C26 C34 C35 C36 C37 C38 C40 C41 C42 C43 C44 C45 C46 C47 C48 C49 C50 C51 C53: library part Cap, "Capacitor"
C6 C7 C28 C29 C30 C31 C32 C33 C39: library part "Cap Pol3", "Polarized Capacitor (Surface Mount)"
C17 C18 C19 C21 C22 C25 C27 C52 C54: library part CAP, "Capacitor"
CR1 U2 U5: "Imported"
D1: library part "Diode BAS70", "Silicon AF Schottky Diode for High-Speed Switching"
JP1: library part JP2
L1: library part Inductor, "Inductor"
LD1: library part Two_Color_LED, "Two Color diode"
LD2 LD3 LD4: library part LED2, "Typical RED, GREEN, YELLOW, AMBER GaAs LED"
P1 P2 P3: library part SMB-4, "4-pin SMB for I-PEX 4"
P4: "Header, 2-Pin"
P5: library part MHDR1X5, "Header, 5-Pin"
P7: "Header, 5-Pin"
R1 R2 R3 R4 R5 R6 R7 R8 R9 R10 R11 R12 R13 R14 R15 R16 R17 R19 R21 R22 R23 R24 R25 R26 R27 R28 R29 R30 R31 R32: library part Res1, "Resistor"
U1: "quectek EC20 R2.0"
U3: library part WLCSP72, "footprint: WLCSP72"
U6: library part LD39050P
U8: "BMP2820"
U9: library part "IS25LP128FJBLE SOIC 8*3"
X1 X2: library part CRYSTAL, "Crystal"

## Via types
v1: diameter 12, hole 8, Component Side to Solder Side, 259 vias
v2: diameter 20, hole 12, Component Side to Solder Side, 55 vias
v3: diameter 47.24, hole 31.5, Component Side to Solder Side, 2 vias
v4: diameter 8.27, hole 7.87, Component Side to Solder Side, 1 vias

## Nets (pads, with @x,y where several pads share a name; then routed paths per layer and width w, separated by ;. In a path a pad name is that pad's centre, name@x,y a point inside that pad or via, vN(x,y) a via of type N, cw(c..) or ccw(c..) an arc to the next point about the centre after c; other vN are vias at no path point)
3P3_MCU: C20.2 C23.1 C24.2 C26.2 C32.1 C45.2 C46.2 C47.1 C49.1 C50.2 C51.2 C53.2 C54.1 L1.1 P5.4 R24.2 R25.1 R26.2 R28.1 R29.2 R31.1 SB3.2 U2.19 U3.A1 U3.A9 U3.B6 U3.G8 U3.J1 U3.J8 U4.17 U4.18 U7.1 U7.8 U7.13 U8.6 U8.8 U9.8 | length 1439.9
  Component Side w6: R26.2@69.09,118.11 v1(69.09,200.79) R24.2@69.09,229.33 ; U2.19@101.38,1121.06 101.38,1185.04 C20.2@115.16,1198.82 115.16,1241.14 v1(116.14,1242.13) 128.94,1254.92 U3.A1@186.02,1254.92 ; C49.1@118.11,62.99 124.02,68.91 v1(155.48,68.91) U7.1@186.93,68.91 ; R25.1@153.74,287.4 v1(153.74,316.93) R31.1@153.74,345.47 ; 162.2,751.18 161.42,751.97 162.2,752.76 170.28,752.76 ; U3.A9@186.02,1380.91 v1(186.02,1406.5) ; U4.18@216.54,598.43 200.79,598.43 v1(189.96,609.25) 165.35,633.86 v1(189.96,633.86) 199.8,624.02 U4.17@216.54,624.02 ; R28.1@229.53,404.53 229.33,404.72 v1(229.33,428.15) v1@230.31,429.13 ; C47.1@230.31,229.33 v1@256.4,203.25 ; C46.2@254.92,289.57 C46.2@260.83,289.57 v1(281.3,289.57) 290.35,280.51 U8.8@314.96,280.51 U8.8@316.93,280.51 ; v1(256.89,203.74) v1@256.4,203.25 ; U7.13@265.67,180.91 265.67,193.98 v1@256.4,203.25 ; U7.8@282.28,101.28 293.4,101.28 301.18,93.5 301.18,67.91 v1(288.39,55.12) ; U3.J1@312.01,1254.92 342.52,1254.92 v1(347.44,1250) 373.03,1224.41 C24.2@381.89,1224.41 ; U3.J8@312.01,1365.16 361.54,1365.16 369.41,1373.03 C53.2@372.05,1373.03 C53.2@379.13,1373.03 ; U8.6@366.14,273.62 v1(366.14,251.97) C45.2@385.83,232.28
  Component Side w12: C50.2@109.25,751.97 v1(136.81,751.97) 161.42,751.97 ; C51.2@162.2,689.96 153.54,698.62 v1(153.54,718.5) 153.54,742.52 162.2,751.18
  Inner Layer 1 w6: v1(280.51,1365.16) 280.51,1375.98 285.43,1380.91 346.46,1380.91 348.43,1382.87 v1(348.43,1381.89)
  Solder Side w6: C54.1@116.14,1239.17 v1(116.14,1242.13) ; 183.7,1426.73 186.02,1424.41 v1(186.02,1406.5) ; v1(348.43,1381.89) 368.31,1381.89 C23.1@379.13,1371.06
  Solder Side w8: L1.1@337.7,1536.73 365.93,1564.96 436.47,1564.96 P5.4@467.7,1533.73
  other v1: 201.77,1333.66 342.52,1365.16
  other v2: 682.09,1548.23 762.8,1549.21
3P8_VBAT: C6.1 C7.1 C8.2 C9.2 C10.2 C11.2 C12.2 C13.2 D1.2 LD3.1 SB2.2 U1.57 U1.58 U1.59 U1.60 | length 1600.5
  Component Side w6: LD3.1@1157.48,1562.99 1182.09,1538.39 v1(1187.99,1538.39)
  Component Side w8: v2@1388.24,1277.7 v2(1389.56,1279.02) ; 1490.6,1273.63 1495.98,1279.02
  Component Side w20: U1.58@1439.42,1216.73 1439.42,1279.02 ; U1.57@1490.6,1216.73 1490.6,1273.63 ; 1495.98,1279.02 1505.98,1279.02
  Component Side w30: U1.59@1388.24,1216.73 v2@1388.24,1277.7 ; v2(1389.56,1279.02) 1439.42,1279.02 1491.14,1279.02 1495.98,1279.02 ; 1390.7,1291.73 v2@1390.7,1343.73 ; 1505.98,1279.02 1525.7,1298.73 D1.2@1751.97,1298.73
  Component Side w35: U1.60@1337.7,1237.73 1337.7,1268.73
  Component Side w40: 1337.7,1268.73 1359.7,1290.73 v2@1360.7,1290.73 ; v2(1357.7,1356.73) 1360.7,1352.98 v2(1360.7,1299.21) v2@1360.7,1290.73 ; v2@1388.24,1277.7 1375.2,1290.73 v2@1360.7,1290.73
  Inner Layer 2 w6: v1(1187.99,1538.39) 1212.6,1513.78 1212.6,1447.83 1303.7,1356.73 v2(1357.7,1356.73)
  Solder Side w8: C8.2@1542.7,1373.73 1552.7,1383.73 ; C7.1@1682.7,1253.73 C7.1@1682.7,1266.73 C7.1@1689.7,1259.73 ; v2@1723.7,1266.73 v2@1726.7,1269.73
  Solder Side w20: v2(1394.68,1351.38) 1394.68,1351.72 1416.7,1373.73 C6.1@1477.7,1373.73 C8.2@1542.7,1373.73 ; 1552.7,1383.73 C10.2@1602.7,1383.73 C9.2@1662.7,1383.73 ; C13.2@1631.7,1202.73 C7.1@1682.7,1253.73 ; C7.1@1682.7,1266.73 1723.7,1266.73 C11.2@1745.7,1266.73 ; C12.2@1689.7,1202.73 C7.1@1689.7,1259.73
  other v2: 1717.52,1267.72 1377.95,1328.74
5V_IN: C33.1 C34.2 C41.2 C42.2 D2.2 D3.1 P4.1 R1.1 U5.7 U5.8 U5.9 U5.10 U5.11 U5.12 U6.1 U6.6 | length 884.1
  Component Side w8: 1011.83,1373.73 1012.83,1372.73 ; U5.10@1012.83,1363.89 1012.83,1372.73 ; U5.9@1012.83,1383.57 1012.83,1372.73
  Component Side w10: R1.1@962.4,1560.04 962.4,1549.41 1032.48,1479.33
  Component Side w30: C42.2@959.65,1307.09 1007.87,1307.09 1007.87,1319.56 U5.12@1012.83,1324.52 ; C41.2@964.37,1452.76 1003.13,1452.76 1006.1,1455.73 ; 1006.1,1373.73 1011.83,1373.73
  Component Side w45: v2@1006.1,1335.72 1006.1,1373.73 1006.1,1382.87 1006.1,1455.73 ; 1032.48,1479.33 1184.06,1479.33 1233.27,1528.54
  Solder Side w20: U6.1@864.7,1302.37 887.7,1325.37 887.7,1359.73 898.7,1370.73 ; U6.6@864.7,1404.73 895.7,1373.73 ; C33.1@1010.7,1310.73 v2(1010.7,1333.73)
  Solder Side w25: v2(1010.7,1333.73) C34.2@1010.7,1365.73
  Solder Side w40: 895.7,1373.73 999.3,1373.73 C34.2@1006.89,1366.14
  other v2: 997.05,1382.87
ANT_DIV: C1.1 R5.1 U1.35 | length 293
  Component Side w34.69: U1.35@1542.32,94.49 1542.32,241.35 v1(1558.7,257.73)
  Solder Side w34.69: v1(1558.7,257.73) C1.1@1624.7,257.73 R5.1@1681.7,257.73
ANT_DT: C5.1 P1.1 R5.2 | length 177.9
  Solder Side w34.69: P1.1@1727.37,101.38 1748.72,122.73 1752.7,122.73 1752.7,181.73 C5.1@1732.7,201.73 1731.7,202.73 R5.2@1731.7,257.73
ANT_G: C3.1 C4.2 U1.47 | length 196.8
  Component Side w34.69: v2(1624.7,655.73) 1640.42,671.46 U1.47@1718.94,671.46
  Solder Side w34.69: v2(1624.7,655.73) C3.1@1624.7,617.73 C4.2@1682.7,617.73
ANT_GT: C4.1 C15.1 P3.1 | length 164.4
  Solder Side w34.69: P3.1@1732.7,470.73 1753.7,491.73 1753.7,540.73 C15.1@1732.7,561.73 C4.1@1732.7,617.73
ANT_M: C2.1 R6.1 U1.49 | length 163.3
  Component Side w34.69: v2@1648.7,895.73 1648.76,895.67 U1.49@1719.49,895.67
  Solder Side w34.69: v2(1648.62,896.65) 1647.78,896.65 C2.1@1624.7,919.73 R6.1@1683.7,919.73
ANT_MT: C14.1 P2.1 R6.2 | length 159.7
  Solder Side w34.69: P2.1@1731.46,1062.73 1752.7,1041.49 1752.7,993.73 C14.1@1733.7,974.73 R6.2@1733.7,919.73
AVDD: C17.1 C52.1 L1.2 U3.H9 | length 224.6
  Component Side w6: U3.H9@296.26,1380.91 297.24,1381.89 296.26,1382.87 v1(296.26,1397.64) ; v1(337.6,1452.76) 365.16,1425.2 C52.1@378.15,1425.2
  Solder Side w6: v1(296.26,1397.64) 301.18,1402.56 314.96,1402.56 338.58,1426.18 337.7,1427.06 337.7,1434.94 ; L1.2@337.7,1481.73 337.7,1434.94 ; C17.1@379.13,1426.18 346.46,1426.18 337.7,1434.94
BMP_CS: R25.2 U3.G7 U8.2 | length 1867.1
  Component Side w6: R25.2@203.74,287.4 231.3,314.96 286.42,314.96 293.31,308.07 330.71,308.07 v1(340.55,317.91) U8.2@340.55,340.75
  Inner Layer 1 w6: v1(340.55,317.91) 374.02,317.91 467.52,411.42 467.52,610.24 532.48,675.2 551.18,675.2 v1(626.97,750.98)
  Inner Layer 2 w6: v1(280.51,1349.41) 267.72,1349.41 262.8,1354.33 262.8,1414.37 267.72,1419.29 614.17,1419.29 626.97,1406.5 v1(626.97,750.98)
BMP_SCK: R28.2 U3.H2 U8.4 | length 1225.1
  Component Side w6: R28.2@279.53,404.53 298.23,404.53 318.9,383.86 384.84,383.86 v1@391.73,376.97 ; U8.4@391.73,341.54 v1(391.73,371.06)
  Inner Layer 1 w6: v1(296.26,1270.67) 321.85,1270.67 337.6,1286.42 362.2,1286.42 403.54,1245.08 v1(423.23,1245.08)
  Inner Layer 2 w6: v1(391.73,371.06) 435.04,414.37 435.04,772.64 393.7,813.98 393.7,839.57 423.23,869.09 v1(423.23,1245.08)
BMP_SDI: R31.2 U3.G1 U8.3 | length 1157.3
  Component Side w6: R31.2@203.74,345.47 225.39,367.13 v1(366.14,367.13) ; U3.G1@280.51,1254.92 280.51,1201.77 289.37,1192.91 341.54,1192.91 350.39,1184.06 v1(350.39,1138.78) ; U8.3@366.14,341.54 v1(366.14,367.13)
  Inner Layer 2 w6: v1(350.39,1138.78) 342.52,1130.91 342.52,786.42 366.14,762.8 v1(366.14,367.13)
BMP_SDO: R23.2 U3.F7 U8.5 | length 1964.7
  Component Side w6: v1(250.98,1333.66) 252.95,1333.66 264.76,1345.47 U3.F7@264.76,1349.41 ; R23.2@389.76,404.53 394.68,404.53 414.37,384.84 414.37,325.79 391.73,303.15 U8.5@391.73,280.51
  Inner Layer 1 w6: v1(401.58,312.99) 492.13,403.54 492.13,571.85 579.72,659.45 579.72,671.26 v1(709.65,801.18)
  Inner Layer 2 w6: v1(250.98,1333.66) 250.98,1347.44 249.02,1345.47 249.02,1422.24 261.81,1435.04 687.01,1435.04 709.65,1412.4 v1(709.65,801.18)
CELL_3P3: C18.1 D4.1 U3.B9 | length 1202.6
  Component Side w6: U3.B9@201.77,1380.91 201.77,1414.37 v1(213.58,1426.18)
  Inner Layer 1 w15: v1(213.58,1426.18) 213.58,1474.41 235.24,1496.06 646.65,1496.06 667.32,1516.73 885.83,1516.73 938.98,1569.88 v1(1200.79,1569.88)
  Solder Side w6: v1(213.58,1426.18) C18.1@246.26,1426.18
  Solder Side w15: v1(1200.79,1569.88) 1237.2,1569.88 D4.1@1243.11,1563.98
CELL_3P7: D2.1 D3.2 D4.2 JP1.1 | length 1339
  Component Side w30: D2.1@1361.22,1428.15 D2.1@1372.05,1438.98
  Component Side w35: D2.1@1372.05,1438.98 1470.47,1438.98 v2(1536.42,1438.98) 1604.53,1438.98 v2(1605.51,1439.96) v2(1633.07,1467.52) JP1.1@1677.36,1511.81
  Component Side w45: D3.2@1268.7,1428.15 D2.1@1361.22,1428.15
  Inner Layer 1 w35: v2(1253.94,1439.96) v2(1408.46,1439.96) v2(1470.47,1439.96) v2(1605.51,1439.96) v2(1633.07,1467.52) JP1.1@1677.36,1511.81
  Solder Side w35: D4.2@1268.7,1430.12 1278.54,1439.96 v2(1408.46,1439.96) v2(1470.47,1439.96) v2(1605.51,1439.96) v2(1633.07,1467.52) JP1.1@1677.36,1511.81
  other v2: 1315.94,1440.94
DB_CLK: P5.1 U3.B2 | length 793.1
  Component Side w6: v1(407.48,1212.6) 542.32,1212.6 552.17,1222.44 552.17,1467.52 551.83,1467.86 P5.1@617.7,1533.73
  Inner Layer 2 w6: v1(201.77,1270.67) 184.06,1252.95 184.06,1214.57 207.68,1190.94 385.83,1190.94 v1(407.48,1212.6)
DB_SDIO: P5.2 U3.C2 | length 663.1
  Inner Layer 2 w6: v1(217.52,1270.67) 217.52,1240.16 251.97,1205.71 357.28,1205.71 405.51,1253.94 v1(405.51,1282.48)
  Solder Side w6: v1(405.51,1282.48) 405.51,1437.99 430.12,1462.6 430.12,1492.13 439.96,1501.97 549.21,1501.97 566.21,1518.97 P5.2@566.21,1533.73
EC20_1P8: C16.2 R4.2 R9.2 R12.1 R32.1 U1.7 U2.2 | length 2497.8
  Component Side w6: 114.17,917.32 115.16,916.34 ; 323.82,929.13 324.8,930.12 ; 323.82,930.12 323.82,951.57 350.39,978.15 350.39,1036.42 R9.2@374.02,1060.04 ; U1.7@479.33,844.49 480.31,843.5 v1(535.43,843.5)
  Component Side w12: U2.2@101.38,975.39 101.38,930.12 114.17,917.32 ; 115.16,916.34 127.95,929.13 323.82,929.13 404.53,929.13 414.37,919.29 414.37,863.19 432.87,844.68 U1.7@478.79,844.68
  Component Side w16: C16.2@115.16,886.81 115.16,916.34 ; R12.1@117.13,832.68 C16.2@117.13,886.81
  Inner Layer 1 w6: v1(535.43,843.5) 535.43,844.49 686.02,844.49 719.49,877.95 1264.76,877.95 v1(1318.9,932.09)
  Solder Side w6: R4.2@1286.7,1368.73 1317.7,1337.73 1317.7,1251.97 ; v1@1317.7,932.09 1317.7,1251.97 ; v1@1318.9,931.1 v1(1318.9,932.09) ; R32.1@1716.54,1333.86 1678.94,1296.26 1585.63,1296.26 1541.34,1251.97 1317.7,1251.97
EC20_CTL: Q1.1 U3.F1 | length 1579.4
  Component Side w6: v1(264.76,1230.32) 264.76,1252.95 265.75,1253.94 U3.F1@264.76,1254.92 ; v1(1415.35,1400.59) 1427.01,1388.93 Q1.1@1427.01,1318.39
  Inner Layer 1 w6: v1(264.76,1230.32) 264.76,1207.68 265.75,1206.69 264.76,1205.71 272.64,1197.83 369.09,1197.83 384.84,1182.09 1328.74,1182.09 1373.03,1137.8 v1(1415.35,1137.8)
  Inner Layer 2 w6: v1(1415.35,1137.8) v1(1415.35,1400.59)
EC20_DBRX: U1.11 U2.4 | length 824.2
  Component Side w6: v1(140.75,948.82) U2.4@140.75,985.24 ; v1(384.84,496.06) 385.83,496.06 407.68,517.91 U1.11@478.79,517.91
  Inner Layer 1 w6: v1(173.23,491.14) 379.92,491.14 v1(384.84,496.06)
  Inner Layer 2 w6: v1(140.75,948.82) 140.75,828.74 173.23,796.26 v1(173.23,491.14)
EC20_DBTX: U1.12 U2.5 | length 904
  Component Side w6: v1(160.43,956.69) U2.5@160.43,985.24 ; v1(414.37,488.19) 457.33,488.19 U1.12@478.79,466.73
  Inner Layer 1 w6: v1(187.01,434.06) 219.49,466.54 392.72,466.54 v1(414.37,488.19)
  Inner Layer 2 w6: v1(160.43,956.69) 160.43,836.61 190.94,806.1 190.94,666.34 209.65,647.64 209.65,456.69 v1(187.01,434.06)
EC20_DIS: Q3.3 R12.2 R32.2 U1.4 | length 2504.4
  Component Side w6: Q3.3@1630.69,1384.07 Q3.3@1635.01,1384.07 1635.01,1397.81 v1(1658.46,1421.26)
  Component Side w8: R12.2@67.13,832.68 101.38,798.43 v1(101.38,798.23) ; U1.4@479.33,998.03 539.37,998.03 541.34,1000 542.32,1000 540.35,1001.97 541.34,1002.95 v1(541.34,1005.91)
  Inner Layer 1 w8: v1@101.38,802.17 113.19,813.98 113.19,927.17 89.57,950.79 89.57,987.2 108.27,1005.91 v1(541.34,1005.91) 1576.77,1005.91 1591.54,1020.67 v1(1591.54,1039.37)
  Inner Layer 2 w6: v1(1658.46,1421.26) 1604.33,1367.13 1604.33,1358.27 v1(1750,1358.27)
  Inner Layer 2 w8: v1(1591.54,1039.37) 1591.54,1091.54 1604.33,1104.33 1604.33,1358.27
  Solder Side w6: R32.2@1716.54,1383.86 1724.41,1383.86 v1(1750,1358.27)
EC20_DISABLE: Q3.1 U3.F2 | length 1703.9
  Component Side w6: Q3.1@1615.33,1342.73 1611.22,1346.84 1611.22,1403.54 v1(1627.95,1420.28)
  Inner Layer 1 w6: v1(264.76,1270.67) 264.76,1256.89 309.06,1212.6 380.91,1212.6 396.65,1196.85 1615.16,1196.85 1627.95,1209.65 v1(1627.95,1420.28)
EC20_NET_MODE: U1.5 U2.3 | length 375.9
  Component Side w6: v1(121.06,955.71) U2.3@121.06,985.24 ; v1(404.53,949.8) 432.09,949.8 U1.5@433.07,948.82
  Solder Side w6: v1(121.06,955.71) 121.06,934.06 125.98,929.13 386.81,929.13 404.53,946.85 v1(404.53,949.8)
EC20_NET_STA: Q4.1 U1.6 | length 1187.8
  Component Side w6: U1.6@479.33,895.67 v1(541.34,895.67)
  Inner Layer 1 w6: v1(541.34,895.67) 1010.83,895.67 v1(1036.42,921.26)
  Inner Layer 2 w6: v1(1036.42,921.26) 1036.7,921.54 v1(1036.7,1134.73)
  Solder Side w6: v1(1036.7,1134.73) 1036.7,1393.73 1000.98,1429.45 1000.98,1456.69 1008.39,1464.1 Q4.1@1067.7,1464.1
EC20_PWRKEY: Q1.3 U1.21 | length 1958.2
  Component Side w6: U1.21@825.79,94.49 825.79,137.8 867.13,179.13 1438.98,179.13 v1(1444.88,185.04)
  Component Side w8: Q1.3@1442.91,1363.52 Q1.3@1446.7,1359.73 1446.7,1396.8 v1(1445.87,1397.64)
  Inner Layer 2 w6: v1(1444.88,185.04) 1468.5,208.66 1468.5,1372.05 v1@1444.88,1395.67
  Inner Layer 2 w8: v1@1444.88,1395.67 1445.87,1396.65 v1(1445.87,1397.64)
EC20_RDY: U1.2 U2.1 | length 438
  Component Side w6: v1(81.69,1038.39) 81.69,1024.61 U2.1@82.68,1023.62 ; v1(407.48,1091.54) 416.54,1100.59 U1.2@478.79,1100.59
  Solder Side w6: v1(81.69,1038.39) 101.38,1038.39 114.17,1051.18 367.13,1051.18 v1(407.48,1091.54)
EC20_RESET: Q2.1 U3.E1 | length 1688.2
  Component Side w6: v1(249.02,1238.19) 249.02,1250.98 247.05,1252.95 U3.E1@249.02,1254.92 ; v1(1514.76,1399.61) 1514.76,1350.3 Q2.1@1521.33,1343.73
  Inner Layer 1 w6: v1(249.02,1238.19) 249.02,1197.83 247.05,1195.87 258.86,1184.06 359.25,1184.06 376.97,1166.34 1320.87,1166.34 1365.16,1122.05 1486.22,1122.05 v1(1503.94,1139.76)
  Inner Layer 2 w6: v1(1503.94,1139.76) 1525.59,1161.42 1525.59,1388.78 v1(1514.76,1399.61)